# Altium PCB DiodeLadderFilter.PcbDoc
Units mil, origin at the board's own origin, x right, y up, seen from the top; angles counter-clockwise.
Board outline 2500 x 1500 mil, 2 copper layers (Top Layer, Bottom Layer); 67 components, 35 nets, 158 pads, 27 vias.
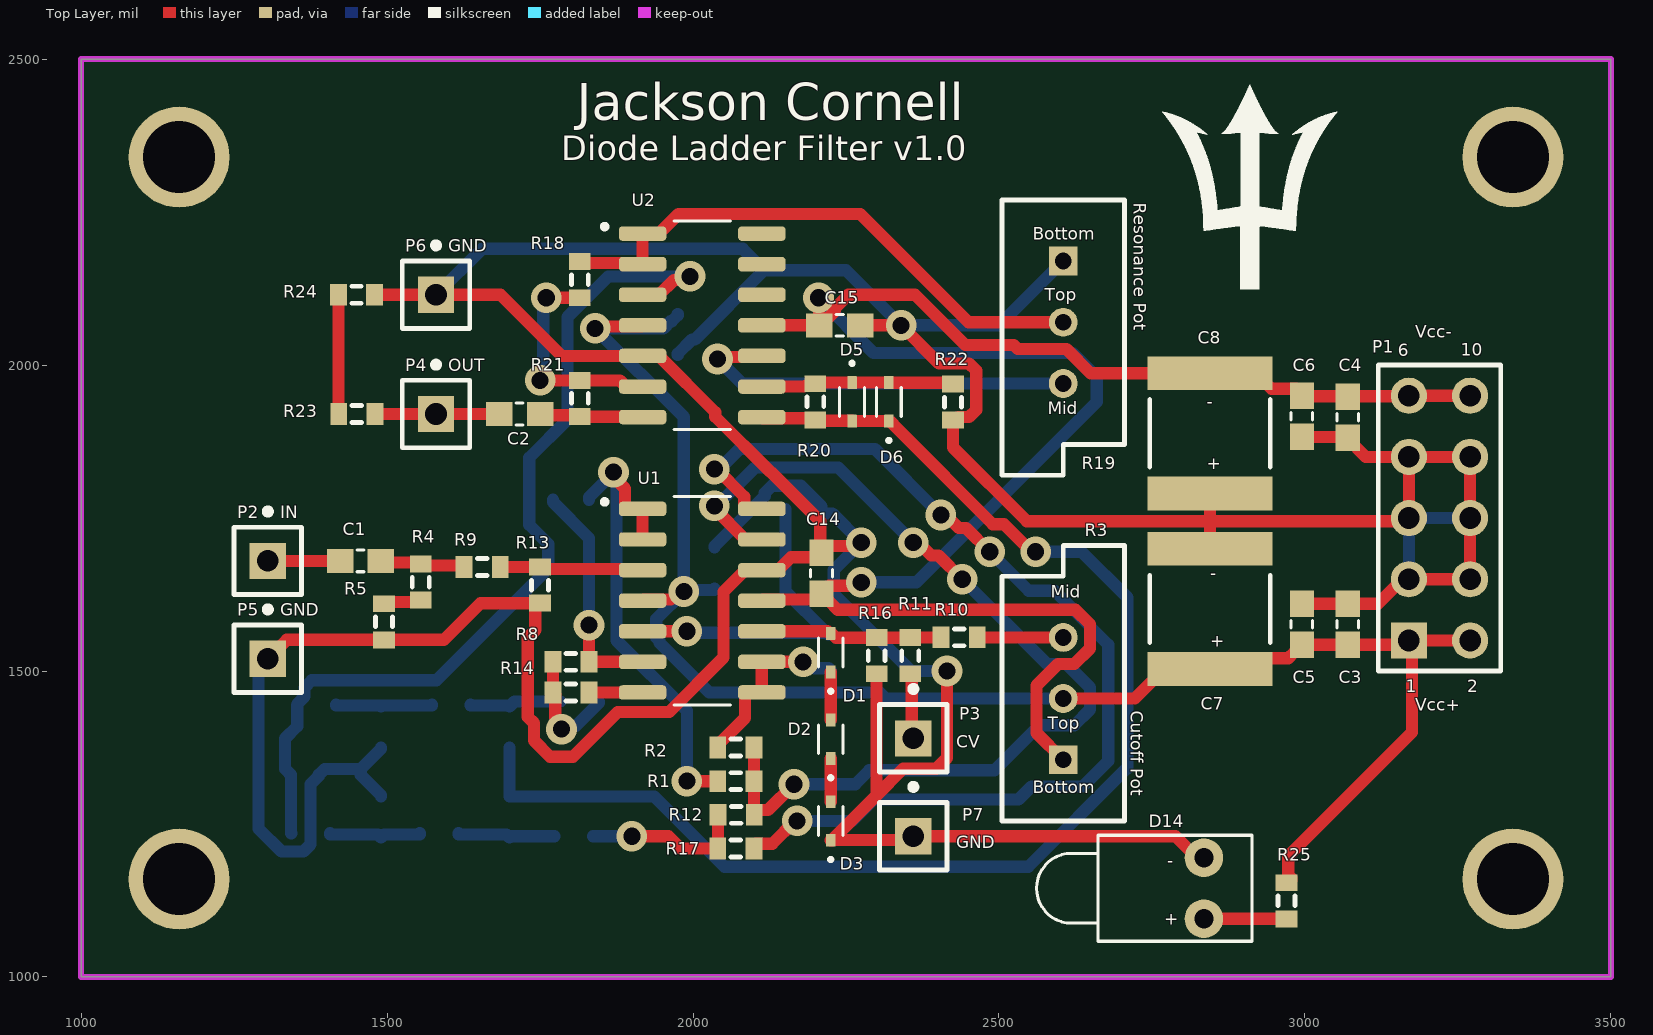
[diagram p0: Top Layer view]
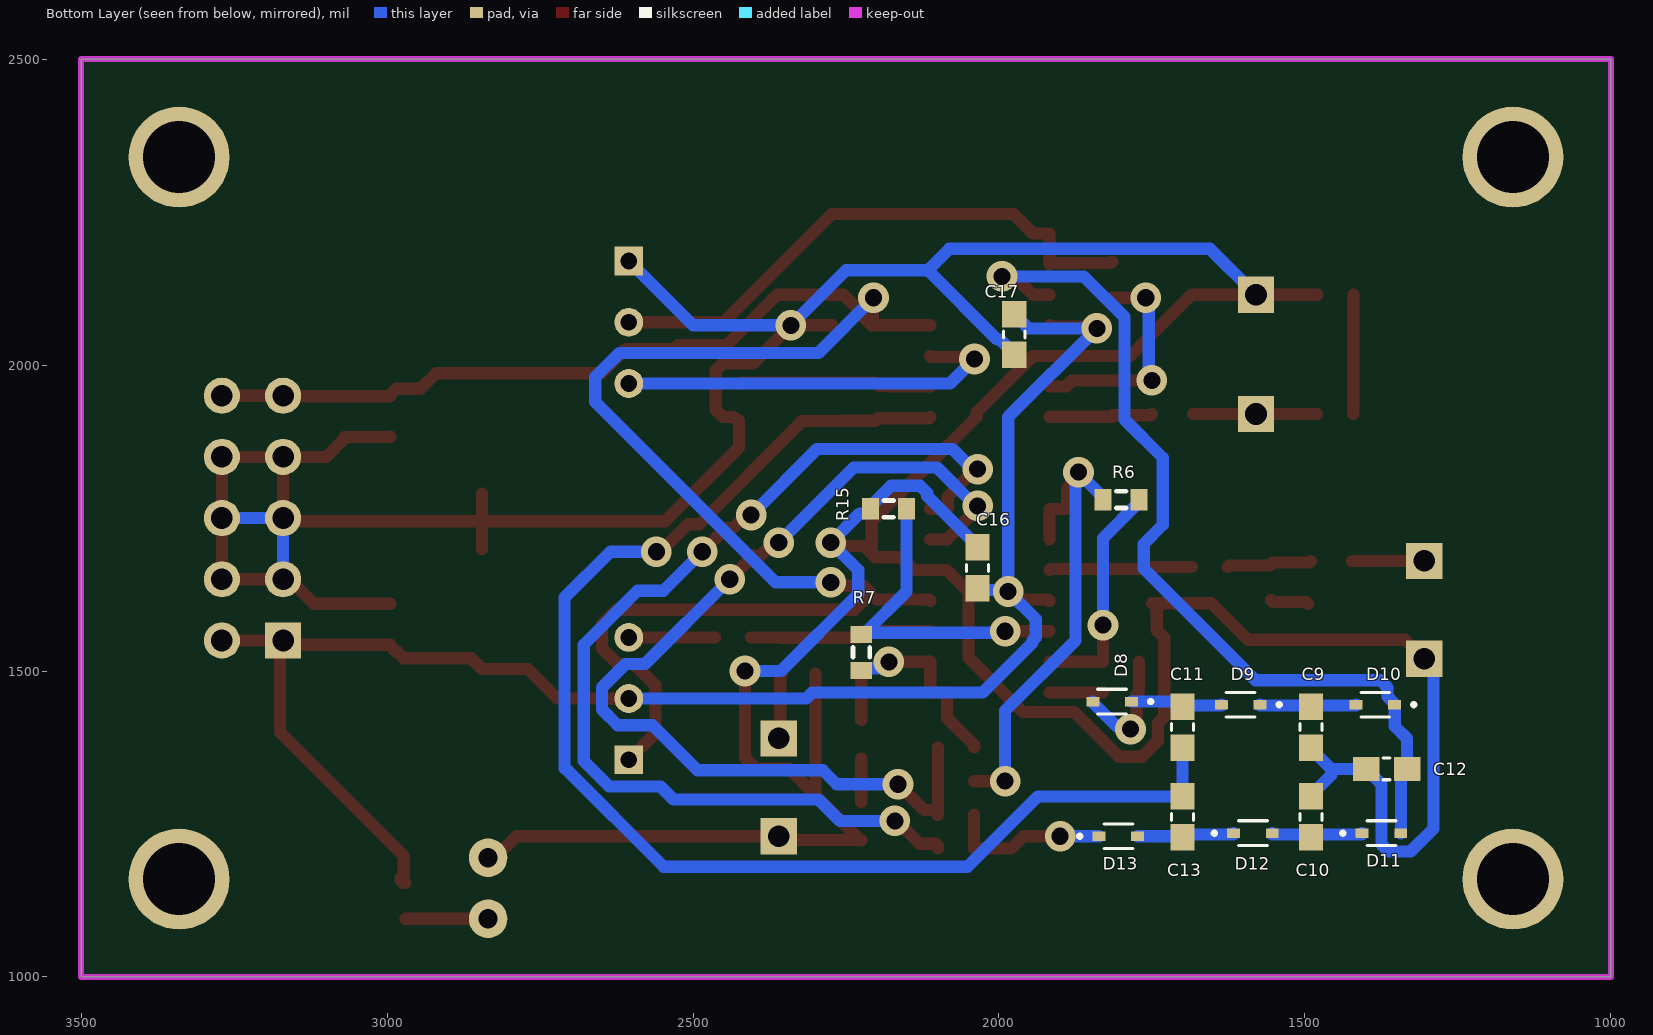
[diagram p1: Bottom Layer view, seen from below]

## Layer stack, top to bottom
Top Solder: solder mask 0.4, Solder Resist, Dk 3.5
Top Layer: signal copper 1.4
Dielectric 1: dielectric 12.6, FR-4, Dk 4.8
Bottom Layer: signal copper 1.4
Bottom Solder: solder mask 0.4, Solder Resist, Dk 3.5

## Board outline
1000,1000 1000,2500 3500,2500 3500,1000

## Design rules (kind name [scope] priority, off if disabled: settings)
Clearance [All] p1: gap=10 ignorepadtopadclearanceinfootprint=FALSE except(0: Arc-Hole Track-Hole SMDPad-Hole THPad-Hole Via-Hole Fill-Hole Poly-Hole Region-Hole Text-Hole; 5: Track-Track Track-SMDPad SMDPad-SMDPad; 7: Track-Via)
HoleSize [All] p1: absolutevalues=TRUE maxlimit=150 minlimit=10 maxpercent=80.000 minpercent=20.000
MinimumAnnularRing [All] p1: minimumring=7
MinimumSolderMaskSliver [All] p1: minsoldermaskwidth=1
PolygonConnect [All] p1: connectstyle=Relief reliefconductorwidth=10 reliefentries=4 polygonreliefangle="90 Angle" airgapwidth=10
RoutingVias [All] p1: holewidth=10 width=22 viastyle="Through Hole" minholewidth=10 minwidth=22 maxholewidth=100 maxwidth=150
SilkToSolderMaskClearance [IsPad] p1: minsilkscreentomaskgap=5 clearancetoexposedcopper=TRUE
SolderMaskExpansion [All] p1: expansion=4
Width [All] p1: maxlimit=150 minlimit=8 preferedwidth=10
27 further rules are at their usual default settings.

## Classes and differential pairs
component class DiodeLadderFilter: C1 C2 C3 C4 C5 C6 C7 C8 C9 C10 C11 C12 C13 C14 C15 C16 C17 D1 D2 D3 D5 D6 D8 D9 D10 D11 D12 D13 D14 P1 P2 P3 P4 P5 P6 R1 R2 R3 R4 R5 R6 R7 R8 R9 R10 R11 R12 R13 R14 R15 R16 R17 R18 R19 R20 R21 R22 R23 R24 R25 U1 U2

## Components (designator, comment, footprint, x,y, rotation, side; value= is the part's Value field where it differs from the comment)
C1 "Cap" CAPC1608X90 1456.54,1680 r0 top value=1uF
C2 "Cap" CAPC1608X90 1716.54,1920 r180 top value=1uF
C3 "Cap" CAPC1608X90 3070,1576.54 r270 top value=0.1uF
C4 "Cap" CAPC1608X90 3070,1915 r270 top value=0.1uF
C5 "Cap" CAPC1608X90 2995,1576.54 r270 top value=1uF
C6 "Cap" CAPC1608X90 2995,1916.54 r270 top value=1uF
C7 "Cap Pol3" 2220 2845,1601.57 r90 top value=10uF
C8 "Cap Pol3" 2220 2845,1888.43 r90 top value=10uF
C9 "Cap" CAPC1608X90 1490,1408.46 r90 bottom value=1nF
C10 "Cap" CAPC1608X90 1490,1261.54 r270 bottom value=1nF
C11 "Cap" CAPC1608X90 1700,1408.46 r90 bottom value=1nF
C12 "Cap" CAPC1608X90 1366.54,1340 r180 bottom value=1nF
C13 "Cap" CAPC1608X90 1700,1261.54 r270 bottom value=1nF
C14 "Cap" CAPC1608X90 2210,1660 r270 top value=1uF
C15 "Cap" CAPC1608X90 2240,2065 r180 top value=1uF
C16 "Cap" CAPC1608X90 2035,1668.46 r270 bottom value=1uF
C17 "Cap" CAPC1608X90 1975,2050 r90 bottom value=1uF
D1 "1N4148W-7-F" SODFL1608X70N 2225,1530 r90 top
D2 "1N4148W-7-F" SODFL1608X70N 2225,1388.5 r90 top
D3 "1N4148W-7-F" SODFL1608X70N 2225,1255 r90 top
D5 "1N4148W-7-F" SODFL1608X70N 2260,1940 r270 top
D6 "1N4148W-7-F" SODFL1608X70N 2320,1940 r90 top
D8 "1N4148W-7-F" SODFL1608X70N 1815,1450 r0 bottom
D9 "1N4148W-7-F" SODFL1608X70N 1605,1445 r0 bottom
D10 "1N4148W-7-F" SODFL1608X70N 1385,1445 r0 bottom
D11 "1N4148W-7-F" SODFL1608X70N 1375,1235 r180 bottom
D12 "1N4148W-7-F" SODFL1608X70N 1585,1235 r180 bottom
D13 "1N4148W-7-F" SODFL1608X70N 1805,1230 r180 bottom
D14 "LED1" LED-1 2835,1145 r180 top
P1 "Header 5X2" HDR2X5 3170,1550 r90 top
P2 "Plug" PIN1 1305,1680 r0 top
P3 "Plug" PIN1 2360,1390 r0 top
P4 "Plug" PIN1 1580,1920 r0 top
P5 "Plug" PIN1 1305,1520 r0 top
P6 "Plug" PIN1 1580,2115 r0 top
P7 "Plug" PIN1 2360,1230 r0 top
R1 "Res3" J1-0603 2070,1320 r0 top value=33K
R2 "Res3" J1-0603 2070,1375 r0 top value=33K
R3 "RPot" VR5 2605,1455 r90 top value=100K
R4 "Res3" J1-0603 1555,1645.47 r90 top value=100K
R5 "Res3" J1-0603 1495,1580.47 r90 top value=100K
R6 "Res3" J1-0603 1800.47,1780 r180 bottom value=33K
R7 "Res3" J1-0603 2225,1530.47 r90 bottom value=33K
R8 "Res3" J1-0603 1800.47,1515 r180 top value=33K
R9 "Res3" J1-0603 1655.47,1670 r0 top value=33K
R10 "Res3" J1-0603 2435,1555 r180 top value=100K
R11 "Res3" J1-0603 2355,1525 r90 top value=100K
R12 "Res3" J1-0603 2070.47,1265 r180 top value=33K
R13 "Res3" J1-0603 1750,1640.47 r90 top value=330
R14 "Res3" J1-0603 1800.47,1465 r180 top value=2K
R15 "Res3" J1-0603 2180.47,1765 r180 bottom value=33K
R16 "Res3" J1-0603 2300,1525 r90 top value=10K
R17 "Res3" J1-0603 2070,1210 r0 top value=2K
R18 "Res3" J1-0603 1815,2139.53 r270 top value=1K
R19 "RPot" VR5 2605,2070 r270 top value=100K
R20 "Res3" J1-0603 2200,1940 r90 top value=10K
R21 "Res3" J1-0603 1815,1945.47 r270 top value=47K
R22 "Res3" J1-0603 2425,1939.53 r90 top value=2.7K
R23 "Res3" J1-0603 1450.47,1920 r0 top value=100K
R24 "Res3" J1-0603 1450,2115 r180 top value=100K
R25 "Res3" J1-0603 2970,1124.53 r90 top value=150
U1 "TL074BCD" SOIC127P600X175-14N 2015,1615 r0 top
U2 "TL074BCD" SOIC127P600X175-14N 2015,2065 r0 top
? "Comment" "Hole 3mm" 3340,1160 r0 top
? "Comment" "Hole 3mm" 3340,2340 r0 top
? "Comment" "Hole 3mm" 1160,2340 r270 top
? "Comment" "Hole 3mm" 1160,1160 r270 top

## Footprints (in the part's own frame and the unit in brackets; to place one, negate y for a bottom-side part, rotate by r counter-clockwise, add the part's x,y. Pads: shape width x height; smd on the part's side, far side on the other; paste and mask are expansions set on the pad)
2220 [mm] "Chip Capacitor, Body 5.7x5.0mm, IPC High Density"
  rect 1.4x5.2 smd: 1(-2.5,0) 2(2.5,0)
  silkscreen extent -1.4,-2.5 1.4,2.5, body extent -2.95,-2.63 2.95,2.63, height 1.4
CAPC1608X90 [mm]
  rect 1.1x1 smd: 1(-0.85,0) 2(0.85,0)
  silkscreen extent -0.15,-0.45 0.15,0.45
HDR2X5 [mm] "Connector; Header; 5x2 Position"
  rect 1.5x1.5 hole 0.9: 1(0,0)
  round 1.5 hole 0.9: 2(0,-2.54) 3(2.54,0) 4(2.54,-2.54) 5(5.08,0) 6(5.08,-2.54) 7(7.62,0) 8(7.62,-2.54) 9(10.16,0) 10(10.16,-2.54)
  silkscreen extent -1.27,-3.81 11.43,1.27
"Hole 3mm" [mil]
  round 165 hole 118.11: 1(0,0)
J1-0603 [mm] "Chip Resistor, Body 1.6x0.8mm, IPC High Density"
  rect 0.7x0.9 smd: 1(-0.75,0) 2(0.75,0)
  silkscreen extent -0.2,-0.35 0.2,0.35, body extent -0.85,-0.48 0.85,0.48, height 0.9
LED-1 [mm] "LED; 2 Leads"
  round 1.6 hole 0.8: 1(0,1.27) 2(0,-1.27)
  silkscreen extent -2,-2.2 6.95,2.2
PIN1 [mm] "Connector; Plug"
  rect 1.5x1.5 hole 0.9: 1(0,0)
  silkscreen extent -1.4,-1.4 1.4,2.17
SODFL1608X70N [mm]
  rrect10% 0.53x0.4 smd: A(0.8,0) C(-0.8,0)
  silkscreen extent -1.65,-0.52 0.6,0.52
SOIC127P600X175-14N [mm]
  rrect50% 1.97x0.6 smd: 1(-2.475,3.81) 2(-2.475,2.54) 3(-2.475,1.27) 4(-2.475,0) 5(-2.475,-1.27) 6(-2.475,-2.54) 7(-2.475,-3.81) 8(2.475,-3.81) 9(2.475,-2.54) 10(2.475,-1.27) 11(2.475,0) 12(2.475,1.27) 13(2.475,2.54) 14(2.475,3.81)
  silkscreen extent -4.15,-4.33 1.17,4.33
VR5 [mm] "Thru-Hole; 3 Leads"
  rect 1.2x1.2 hole 0.7: 1(-2.54,0)
  round 1.2 hole 0.7: 2(0,0) 3(2.54,0)
  silkscreen extent -5.08,-2.54 6.35,2.54

## Part data
C1 C2 C3 C4 C5 C6 C9 C10 C11 C12 C13 C14 C15 C16 C17: "Capacitor", LatestRevisionDate=17-Jul-2002, LatestRevisionNote="Re-released for DXP Platform.", PackageDescription="Radial Cap, Thru-Hole; 2 Leads; 0.3 in Pin Spacing", PackageReference=RAD-0.3, Published=8-Jun-2000, Publisher="Altium Limited"
C7 C8: "Polarized Capacitor (Surface Mount)", LatestRevisionDate=29-May-2009, LatestRevisionNote="IPC-7351 Footprint Added.", PackageDescription="Chip Capacitor", PackageReference=C0805, Published=8-Jun-2000, Publisher="Altium Limited"
D1 D2 D3 D5 D6 D8 D9 D10 D11 D12 D13: "Diode Standard 100V 300mA _DC_ Surface Mount SOD-123", Package="SOD-123 Diodes Inc.", Availability=Unavailable, MF="Diodes Inc.", MP=1N4148W-7-F, Price=None, SnapEDA_Link=https://www.snapeda.com/parts/1N4148W-7-F/Diodes%20Inc./view-part/16/?ref=snap
D14: "Typical RED GaAs LED", LatestRevisionDate=08-Jul-2005, LatestRevisionNote="Mech Layer 1 removed.", PackageDescription="LED; 2 Leads", PackageReference=LED-1, Published=8-Jun-2000, Publisher="Altium Limited"
P1: "Header, 5-Pin, Dual row", LatestRevisionDate=17-Jul-2002, LatestRevisionNote="Re-released for DXP Platform.", Publisher="Altium Limited"
R1 R2 R4 R5 R6 R7 R8 R9 R10 R11 R12 R13 R14 R15 R16 R17 R18 R20 R21 R22 R23 R24 R25: "Resistor", LatestRevisionDate=29-May-2009, LatestRevisionNote="IPC-7351 Footprint Added.", PackageDescription="Chip Resistor", PackageReference=J1-0603, Published=8-Jun-2000, Publisher="Altium Limited"
R3 R19: "Potentiometer", LatestRevisionDate=17-Jul-2002, LatestRevisionNote="Re-released for DXP Platform.", PackageDescription="Variable Resistor, Thru-Hole; 3 Leads", PackageReference=VR5, Published=8-Jun-2000, Publisher="Altium Limited", Set Position=0.5, Sim Note="Enter the Resistance value and the set point into parameter fields."
U1 U2: "Quad low-noise JFET-input low offset operational amplifier 14-SOIC 0 to 70", Package="SOIC-14 Texas Instruments", Arrow_Asia-Purchase-URL=https://snapeda.com/shop?store=Arrow+Asia&id=327414, Availability=Good, DigiKey-Purchase-URL=https://snapeda.com/shop?store=DigiKey&id=327414, MF="Texas Instruments", Mouser-Purchase-URL=https://snapeda.com/shop?store=Mouser&id=327414, MP=TL074BCD, Price=None, SnapEDA_Link=https://www.snapeda.com/parts/TL074BCD/Texas%20Instruments/view-part/327414/?ref=snap, Texas_Instruments-Purchase-URL=https://snapeda.com/shop?store=Texas+Instruments&id=327414
P2 P3 P4 P5 P6 P7: LatestRevisionDate=17-Jul-2002, LatestRevisionNote="Re-released for DXP Platform.", Publisher="Altium Limited"

## Via types
v1: diameter 50, hole 28, Top Layer to Bottom Layer, 18 vias
v2: diameter 50/50 (per signal layer), hole 28, Top Layer to Bottom Layer, 9 vias

## Nets (pads, with @x,y where several pads share a name; then routed paths per layer and width w, separated by ;. In a path a pad name is that pad's centre, name@x,y a point inside that pad or via, vN(x,y) a via of type N, cw(c..) or ccw(c..) an arc to the next point about the centre after c; other vN are vias at no path point)
CUTOFF_IN: P3.1 R11.1 | length 107.5
  Top Layer w20: R11.1 2357.5,1492.97 2357.5,1392.5 P3.1
fiilter-p: D8.A R8.2 R14.2 | length 174.3
  Top Layer w20: R8.2 R14.2 1774.72,1461.22 v1@1774.72,1423.39
  Bottom Layer w20: v1(1785,1405) 1790.74,1410.74 1808.93,1410.74 1846.5,1448.31 D8.A
filter-n: D13.C R12.2 R17.1 | length 267.5
  Top Layer w20: v1(1900,1230) 1960,1230 1980,1210 R17.1 2040.71,1210.24 2040.71,1264.76 R12.2
  Bottom Layer w20: D13.C v1(1900,1230)
NetC1_2: C1.2 R4.2 R9.1 | length 140.1
  Top Layer w20: C1.2 1492.5,1677.5 1552.5,1677.5 R4.2 1557.5,1672.5 1623.44,1672.5 R9.1
NetC9_2: C9.2 D9.C D10.A | length 160.8
  Bottom Layer w20: D10.A 1416.5,1443.9 1416.93,1443.46 1488.46,1443.46 C9.2 1491.54,1443.46 1573.07,1443.46 1573.5,1443.9 D9.C
NetC10_2: C10.2 D11.C D12.A | length 154.7
  Bottom Layer w20: D11.C 1406.5,1233.31 1406.93,1232.87 1485.2,1232.87 C10.2 1494.8,1232.87 1553.07,1232.87 1553.5,1233.31 D12.A
NetC11_2: C11.2 D8.C D9.A | length 152.3
  Bottom Layer w20: D9.A 1636.5,1443.9 1636.93,1443.46 1698.46,1443.46 C11.2 1708.07,1450 D8.C
NetC13_2: C13.2 D12.C D13.A | length 161.7
  Bottom Layer w20: D12.C 1616.5,1233.31 1616.93,1232.87 1695.2,1232.87 C13.2 1701.93,1230 D13.A
NetD1_C: D1.C D2.A | length 78.5
  Top Layer w20: D2.A D1.C
NetD2_C: D2.C D3.A | length 70.5
  Top Layer w20: D3.A D2.C
NetD14_1: D14.1 R25.1 | length 135
  Top Layer w20: D14.1 R25.1
NetR3_3: R3.3 R10.1 | length 140.5
  Top Layer w20: R10.1 R3.3
NetR4_1: R4.1 R5.2 | length 62.5
  Top Layer w20: R5.2 1497.97,1612.97 1552.03,1612.97 R4.1
NetR23_1: R23.1 R24.2 | length 195.2
  Top Layer w20: R24.2 1420.71,2114.76 1420.71,1920.24 R23.1
op1-inn: R1.1 R6.1 U1.1 U1.2 | length 812.2
  Top Layer w20: v1(1870,1825) 1870,1816.88 1888.78,1798.1 1888.78,1766.81 1890.59,1765 U1.1 U1.2 ; v1(1990,1320) R1.1
  Bottom Layer w20: R6.1 1830,1783.94 1870,1823.94 v1(1870,1825) 1875,1820 1875,1550 1990,1435 v1(1990,1320)
op1-inp: R9.2 R13.2 U1.3 | length 234.6
  Top Layer w20: R9.2 R13.2 1753.19,1666.81 1915.75,1666.81 U1.3
op2-inn: R6.2 R8.1 U1.6 | length 377
  Top Layer w20: v1(1830,1575) R8.1 U1.6
  Bottom Layer w20: R6.2 1770.94,1776.06 1830,1717.01 v1(1830,1575)
op2-inp: R7.2 R15.2 U1.5 | length 540
  Top Layer w20: U1.5 v2(1990,1565)
  Bottom Layer w20: v2(1990,1565) 1992.5,1562.5 R7.2@2218.56,1562.5 ; R15.2 2150.94,1630.12 R7.2@2218.56,1562.5 ; R7.2 2221.06,1560 R7.2@2218.56,1562.5
op2-out: R14.1 U1.7 | length 87.6
  Top Layer w20: R14.1 U1.7
op3-inn: R2.1 R7.1 U1.8 U1.9 | length 303.4
  Top Layer w20: R2.1 2040.47,1378.94 2084.72,1423.19 2084.72,1463.19 2086.54,1465 U1.8 U1.9 v1(2180,1515)
  Bottom Layer w20: v1(2180,1515) 2188.12,1515 2198.39,1504.72 2221.22,1504.72 R7.1
op3-inp: D1.A R10.2 R11.2 R16.2 U1.10 | length 297.6
  Top Layer w20: U1.10 2219.8,1565 2223.31,1561.5 D1.A 2226.69,1561.5 2233.66,1554.53 R16.2 R11.2 2355.24,1554.76 2405.24,1554.76 R10.2
op4-inn: R1.2 R2.2 R12.1 U1.13 | length 1659.9
  Top Layer w20: v2(2035,1770) 2035,1765.47 2085.47,1715 U1.13 ; R2.2 R1.2 2099.76,1319.76 2099.76,1265.24 R12.1 2100,1268.94 2103.78,1272.72 2122.72,1272.72 v2(2165,1315) ; v2(2360,1710) 2368.12,1710 2389.23,1688.89 2401.11,1688.89 v2(2440,1650)
  Bottom Layer w20: v2(2035,1770) 2038.64,1770 2101.36,1832.72 2237.28,1832.72 v2(2360,1710) ; v2(2165,1315) 2265,1315 2287.87,1337.87 2492.87,1337.87 2566.38,1411.38 2623.07,1411.38 2648.62,1436.93 2648.62,1473.07 2610.31,1511.38 2578.62,1511.38 v2(2440,1650)
op4-inp: C3.1 C4.2 C5.1 C6.2 C7.2 C8.1 C9.1 C10.1 C12.1 C14.1 C15.1 C16.1 C17.1 D3.C D14.2 P1.3 P1.4 P1.5 P1.6 P1.7 P1.8 P5.1 P6.1 P7.1 R5.1 R13.1 R15.1 R16.1 R19.1 R22.1 R24.1 U1.12 U2.5 | length 8674.3
  Top Layer w20: P5.1 1335.94,1550.94 R5.1 1592.5,1550.94 1652.5,1610.94 R13.1@1746.06,1610.94 ; R24.1 P6.1 1685.3,2115 1785.3,2015 U2.5 1944.53,2015 2036.46,1923.07 2036.46,1915.57 2126.57,1825.45 2127.4,1825.45 2207.74,1745.12 2207.74,1695.73 C14.1 ; R13.1 R13.1@1746.06,1610.94 ; C15.1 v1(2340,2065) 2402.17,2002.83 2451,2002.83 2462.72,1991.12 2462.72,1926.72 2451,1915 2433.94,1915 2428.94,1910 R22.1 2425,1865.47 2545.47,1745 2845,1745 ; v1(2275,1710) 2269.26,1704.26 2219.69,1704.26 2210,1694.57 C14.1 ; R16.1 2300,1296.81 ; v1(2415,1500) 2415,1357.66 2397.81,1340.47 2343.66,1340.47 2300,1296.81 ; D14.2 2823.37,1195 2788.37,1230 P7.1 2353.94,1223.94 D3.C@2227.13,1223.94 ; C7.2 2845,1745 ; C8.1 2845,1745 ; C5.1 C3.1 3119.69,1610 3159.69,1650 P1.3 P1.4 P1.6 P1.8 P1.7 ; C6.2 2995.77,1882.3 3069.23,1882.3 C4.2 3070,1879.57 3099.57,1850 P1.7 ; R13.1@1746.06,1610.94 1742.28,1607.17 1742.28,1567.17 1730,1554.88 1730,1425 1740,1415 1740,1386.36 1766.36,1360 1803.64,1360 1876.83,1433.19 1961.16,1433.19 2050,1522.03 2050,1629.53 2085.47,1665 U1.12 2139.41,1665 2160.31,1685.91 2202.44,1685.91 C14.1 ; D3.C@2227.13,1223.94 2300,1296.81 ; D3.C@2227.13,1223.94 2226.69,1223.5 D3.C 2225.43,1223.94 D3.C@2227.13,1223.94 ; 2845,1745 3165,1745 P1.5 P1.7
  Bottom Layer w20: P5.1 1290,1505 1290,1242.37 1327.37,1205 1363.28,1205 1375,1216.72 1375,1315 1388.35,1328.35 1388.35,1330.31 1398.03,1340 C12.1 1456.97,1340 ; C10.1 1490,1296.97 1456.97,1330 1456.97,1340 ; C9.1 1490,1373.03 1456.97,1340 ; P6.1 1655,2190 2081.16,2190 2116.16,2155 ; C17.1 1975,2018.5 1998.31,2041.81 2002.97,2041.81 2116.16,2155 ; C16.1 2035,1703.9 2117.17,1786.06 2117.17,1791 2128.88,1802.72 2176.22,1802.72 2210,1768.94 R15.1 2210,1761.06 2213.78,1757.28 2227.72,1757.28 v1(2275,1710) 2230,1665 2230,1626.36 2356.36,1500 v1(2415,1500) ; R19.1 2500,2065 v1(2340,2065) 2250,2155 2116.16,2155 ; P1.3 P1.5 P1.6
op4-out: R17.2 U1.14 | length 1735.2
  Top Layer w20: v1(2035,1830) 2038.64,1830 2083.66,1784.98 2083.66,1766.81 2085.47,1765 U1.14 ; R17.2 2099.53,1213.94 2103.31,1217.72 2129.5,1217.72 2166.78,1255 v2(2170,1255) ; v2(2405,1755) 2413.12,1755 2434.23,1733.89 2446.11,1733.89 v2(2485,1695)
  Bottom Layer w20: v1(2035,1830) 2043.12,1830 2075.83,1862.72 2297.28,1862.72 v2(2405,1755) ; v2(2170,1255) 2260,1255 2295,1290 2531.81,1290 2553.19,1311.38 2636.91,1311.38 2678.62,1353.09 2678.62,1543.07 2590.53,1631.16 2548.84,1631.16 v2(2485,1695)
op5-inn: R18.1 R19.2 U2.1 U2.2 | length 928.1
  Top Layer w20: R18.1 1817.24,2166.81 1915.75,2166.81 U2.2 U2.1 1944.53,2215 1976.34,2246.81 2273.19,2246.81 2450,2070 R19.2
op5-inp: C12.2 D10.C D11.A U2.3 | length 1502.4
  Top Layer w20: U2.3 1944.53,2115 1968.79,2139.26 1989.26,2139.26 v1(1995,2145)
  Bottom Layer w20: D11.A 1343.07,1235.43 1343.07,1330.31 1333.39,1340 C12.2 1333.07,1389.69 1353.07,1409.69 1353.07,1444.57 D10.C 1353.5,1446.69 1365,1458.19 1365,1473.28 1376.72,1485 1580.91,1485 1763.48,1667.57 1763.48,1707.68 1732.17,1739 1732.17,1848.48 1795,1911.32 1795,2078.64 1861.36,2145 v1(1995,2145)
op6-inn: R18.2 R21.1 U2.6 | length 365.8
  Top Layer w20: v1(1750,1975) R21.1 1880.59,1975 1890.59,1965 U2.6 ; v1(1760,2110) R18.2
  Bottom Layer w20: v1(1750,1975) 1755,1980 1755,2105 v1(1760,2110)
op6-out: C2.1 R21.2 U2.7 | length 169.6
  Top Layer w20: C2.1 1752.03,1917.97 1812.97,1917.97 R21.2 1815.47,1915.47 1917.09,1915.47 U2.7
op7-inn: D5.C D6.A R20.2 R22.2 U2.9 | length 316.3
  Top Layer w20: U2.9 2181.22,1965 2181.97,1965.75 2196.22,1965.75 R20.2 2201.97,1971.5 D5.C D6.A 2320.43,1971.06 2422.99,1971.06 R22.2
op7-inp: R19.3 U2.10 | length 656.1
  Top Layer w20: v1(2040,2010) 2043.19,2013.19 2110.63,2013.19 U2.10
  Bottom Layer w20: v1(2040,2010) 2080,1970 R19.3
op7-out: C11.1 C13.1 D5.A D6.C R20.1 U2.8 | length 2204.6
  Top Layer w20: U2.8 2114.25,1913.19 2197.28,1913.19 R20.1 2201.54,1908.94 2259.57,1908.94 D5.A D6.C 2321.69,1908.5 2336.11,1894.09 2336.11,1893.89 2490,1740 2508.05,1740 2548.64,1699.41 2548.64,1695 v2(2560,1695)
  Bottom Layer w20: C11.1 C13.1 1936.52,1295 2051.52,1180 2547.95,1180 2708.62,1340.67 ; v2(2560,1695) 2635,1695 2710,1620 2710,1340.67
SIG_IN: C1.1 P2.1 | length 118.1
  Top Layer w20: P2.1 C1.1
SIG_OUT: C2.2 P4.1 R23.2 | length 203.1
  Top Layer w20: R23.2 P4.1 C2.2
Vcc+: C3.2 C5.2 C7.1 C16.2 C17.2 P1.1 P1.2 R3.2 R25.2 U1.4 U2.4 | length 2843
  Top Layer w20: v1(1840,2060) 1843.19,2063.19 1915.75,2063.19 U2.4 ; U1.4 1919.37,1616.81 1963.69,1616.81 1976.88,1630 v1(1985,1630) ; R3.2 2722.05,1455 2770.2,1503.15 C7.1 2862.56,1520.71 2972.64,1520.71 2983.35,1531.42 2985.31,1531.42 2995,1541.1 C5.2 C3.2 P1.1@3163.07,1543.07 ; R25.2@2977.72,1161.77 2977.72,1157.83 2973.94,1154.06 R25.2 2972.83,1156.89 2972.83,1197.83 3175,1400 3175,1531.14 P1.1@3163.07,1543.07 ; P1.2 P1.1 P1.1@3163.07,1543.07
  Bottom Layer w20: C17.2 1975,2081.5 1965.31,2071.81 1963.35,2071.81 1951.54,2060 v1(1840,2060) 1985,1915 v1(1985,1630) ; C16.2@2035,1633.03 C16.2 2032.5,1632.5 1987.5,1632.5 v1(1985,1630) ; R3.2 2315,1455 2305,1465 2026.36,1465 1945,1546.36 1945,1550 1940,1555 1940,1585 v1(1985,1630)
Vcc-: C4.1 C6.1 C8.2 C14.2 C15.2 P1.9 P1.10 R3.1 U1.11 U2.11 | length 3267.5
  Top Layer w20: U1.11 2114.25,1616.81 C14.2@2200.31,1616.81 ; U2.11 C15.2 ; v1(2205,2110) 2205.77,2109.23 2205.77,2065.77 C15.2 ; v1(2275,1645) 2269.26,1639.26 2222.72,1639.26 2221.65,1638.19 2219.69,1638.19 2210,1628.5 C14.2 2210,1624.57 2219.69,1614.88 2221.65,1614.88 2236.54,1600 2625,1600 2648.62,1576.38 2648.62,1536.93 2623.07,1511.38 2596.38,1511.38 2561.38,1476.38 2561.38,1398.62 R3.1 ; P1.10 P1.9 3169.23,1949.23 3070.77,1949.23 C4.1 3069.23,1949.23 2995.77,1949.23 C6.1 2995,1951.65 2985.31,1961.34 2945.31,1961.34 2919.8,1986.85 C8.2 2649.84,1986.85 2610.31,2026.38 2530.75,2026.38 2524.3,2032.83 2444.74,2032.83 2362.57,2115 2253.84,2115 2231.81,2092.97 2231.81,2088.31 2208.5,2065 C15.2
  Bottom Layer w20: v1(2205,2110) 2295,2020 2620,2020 2660,1980 2660,1940 2365,1645 v1(2275,1645)
pads on no net: ?.1 U2.12 U2.13 U2.14

## Polygon pours and split planes (outlines as drawn)
op4-inp on Top Layer "Top Layer-No Net" (hatched 45Degree grid 10 track 5, shelved, pour order 0): 1000,1000 1000,2500 3500,2500 3500,1000
no net on Bottom Layer "Bottom Layer-No Net" (hatched 45Degree grid 20 track 8, shelved, pour order 2): 1000,1000 1000,2500 3500,2500 3500,1000

## Keep-outs
Keep-Out Layer:
  the board outline again, w10

## Silkscreen, mask and mechanical layers (free items; w line width, h text height)
Top Overlay:
  region: 5224 vertices and 0 holes, not listed, extent 2766.64,2123.82 3052.98,2457.95
  text "Jackson Cornell" at 1810,2400 h60
  text "Diode Ladder Filter v1.0" at 1785,2335 h40
  text "Resonance Pot" at 2720,2265 h20 r270
  text "Bottom" at 2555,2205 h20
  text "GND" at 1600,2185 h20
  text "Top" at 2575,2105 h20
  text "Vcc-" at 3180,2045 h20
  text "OUT" at 1600,1990 h20
  text "-" at 2840,1930 h20
  text "Mid" at 2580,1920 h20
  text "+" at 2840,1830 h20
  text "IN" at 1325,1750 h20
  text "-" at 2845,1650 h20
  text "Mid" at 2585,1620 h20
  text "GND" at 1325,1590 h20
  text "+" at 2845,1540 h20
  text "Cutoff Pot" at 2715,1435 h20 r270
  text "Vcc+" at 3180,1435 h20
  text "Top" at 2580,1405 h20
  text "CV" at 2430,1375 h20
  text "Bottom" at 2555,1300 h20
  text "GND" at 2430,1210 h20
  text "-" at 2775,1180 h20
  text "+" at 2770,1085 h20

## Text inside footprints (layer, text, board x,y; h text height)
P1: Top Overlay "2" at 3265,1465 h20; Top Overlay "1" at 3165,1465 h20; Top Overlay "9" at 3170,2035 h20 r180; Top Overlay "10" at 3255,2015 h20